# Altium PCB Bubble_OCB100.PcbDoc
Units mm, origin at the board's own origin, x right, y up, seen from the top; angles counter-clockwise.
Board outline 31.2 x 33.75 mm, 2 copper layers (Top Layer, Bottom Layer); 33 components, 23 nets, 103 pads, 16 vias.
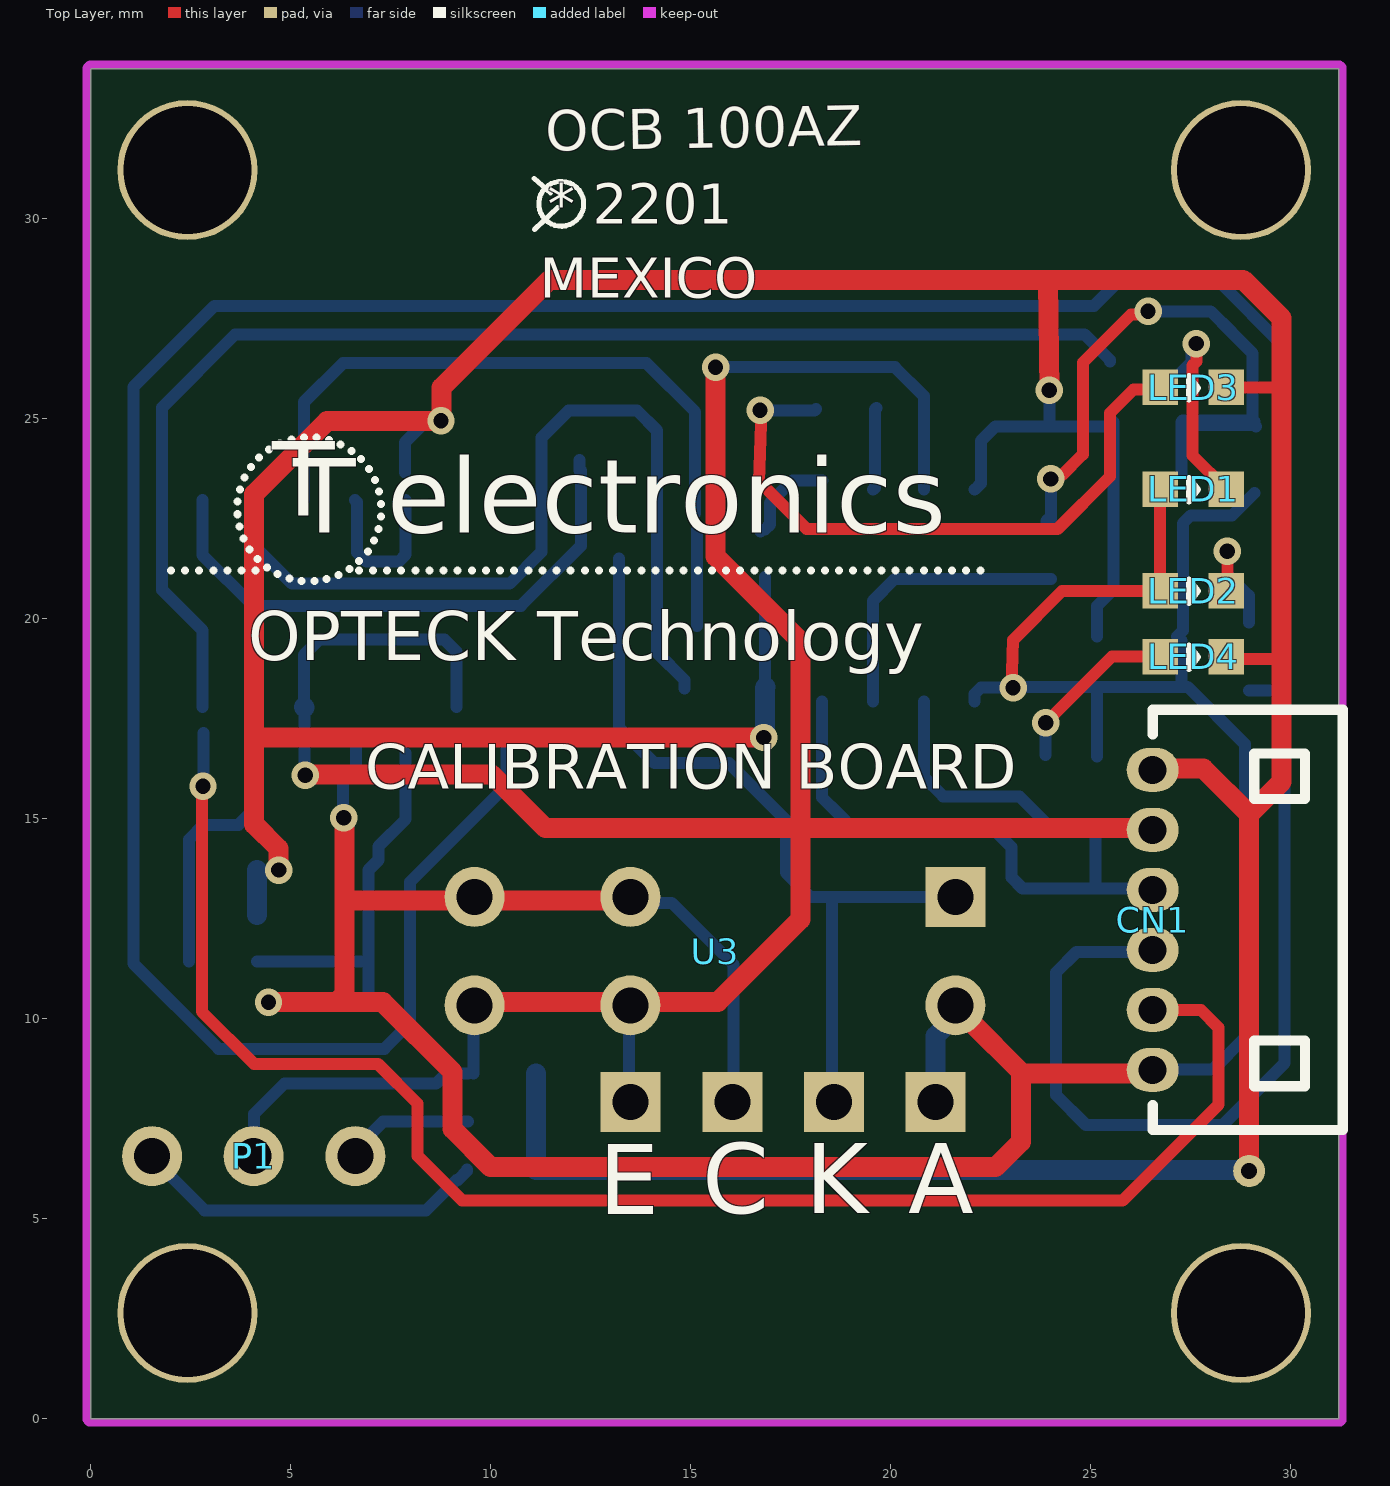
[diagram p0: Top Layer view]
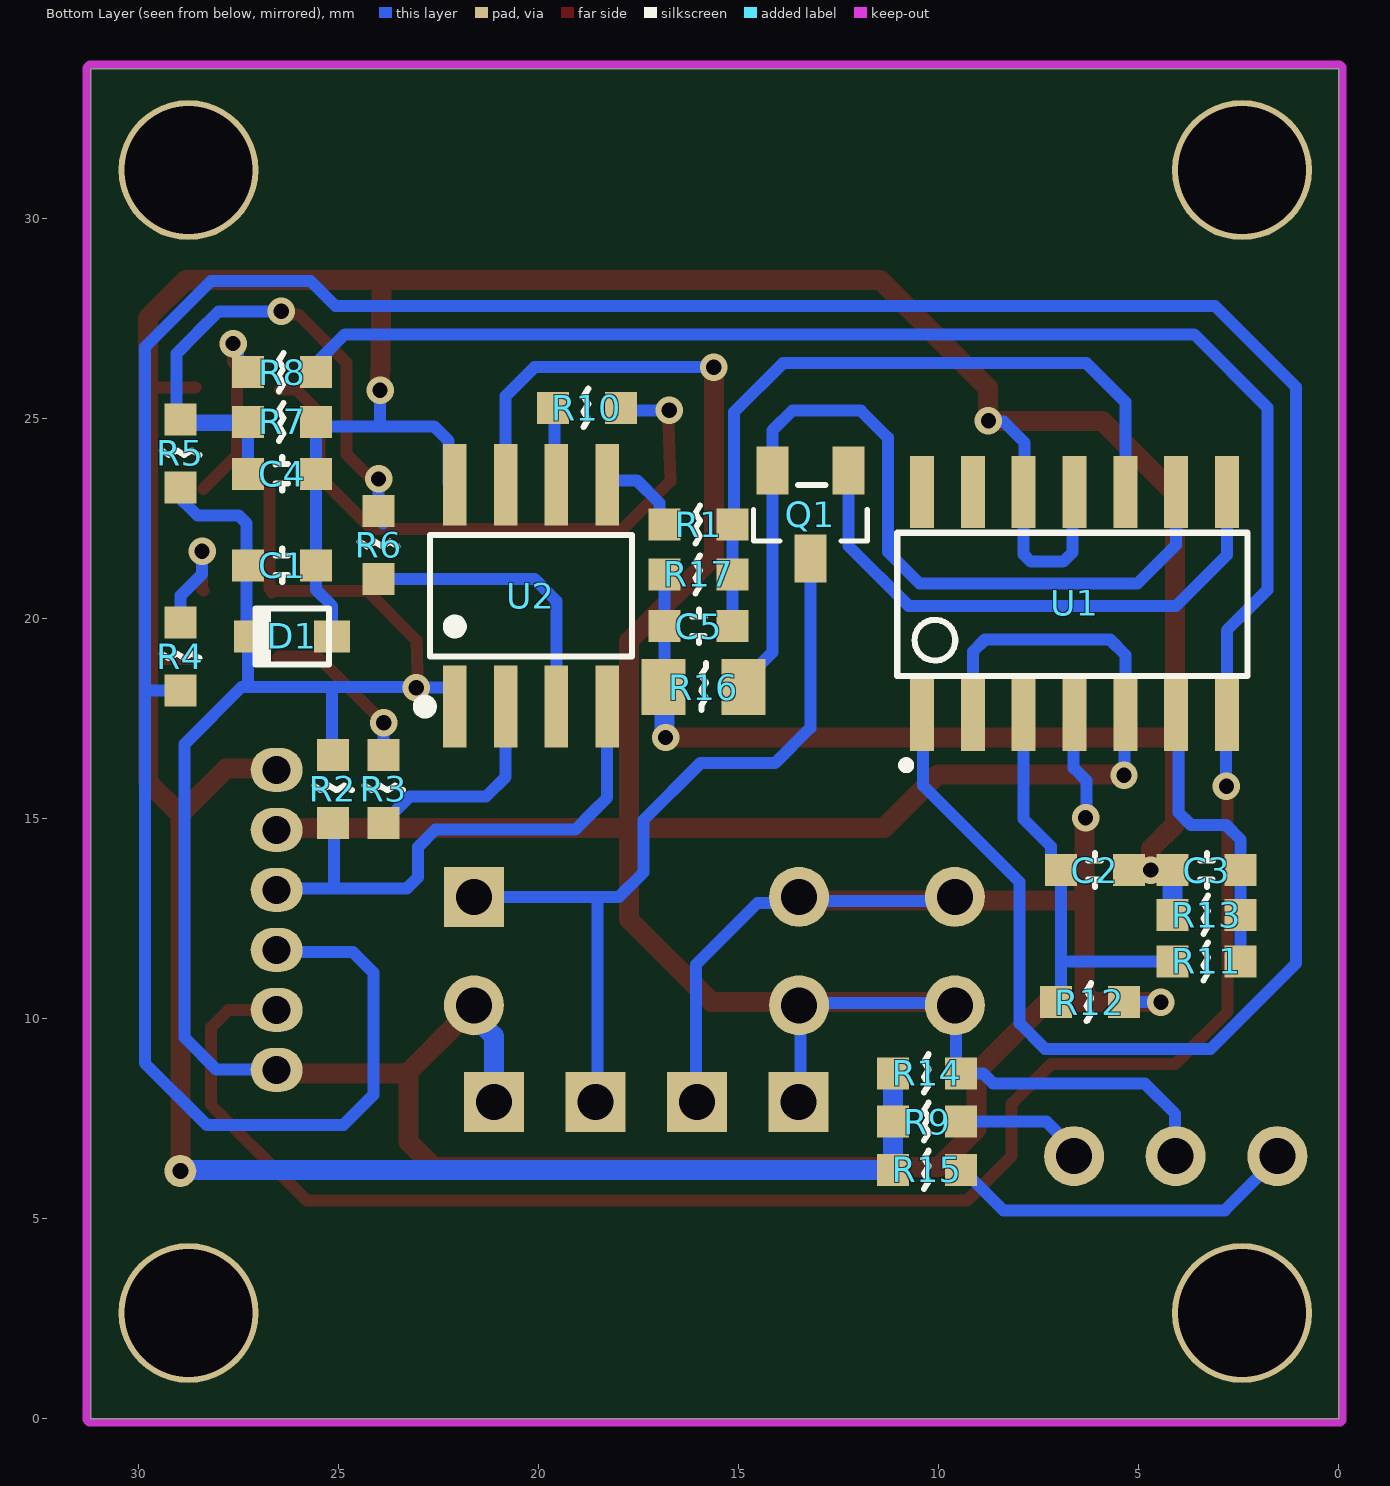
[diagram p1: Bottom Layer view, seen from below]
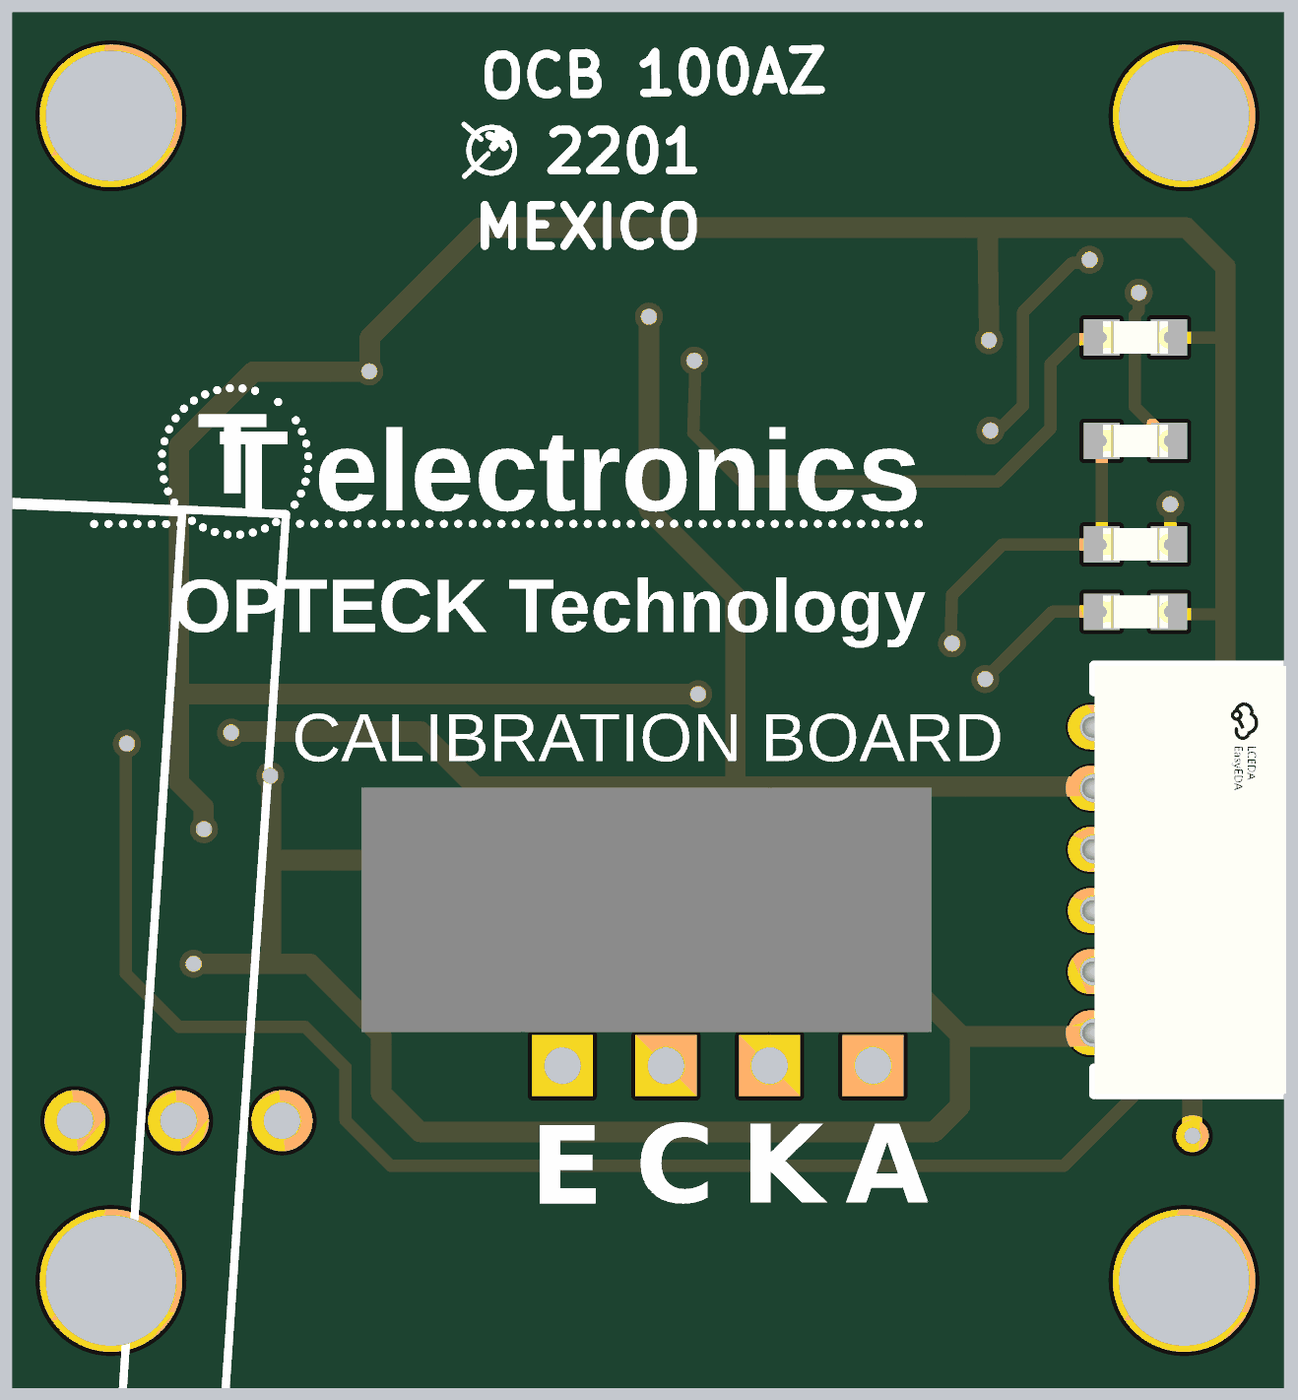
[diagram p2: 3D render of the assembled board from above, using the file's embedded part models]
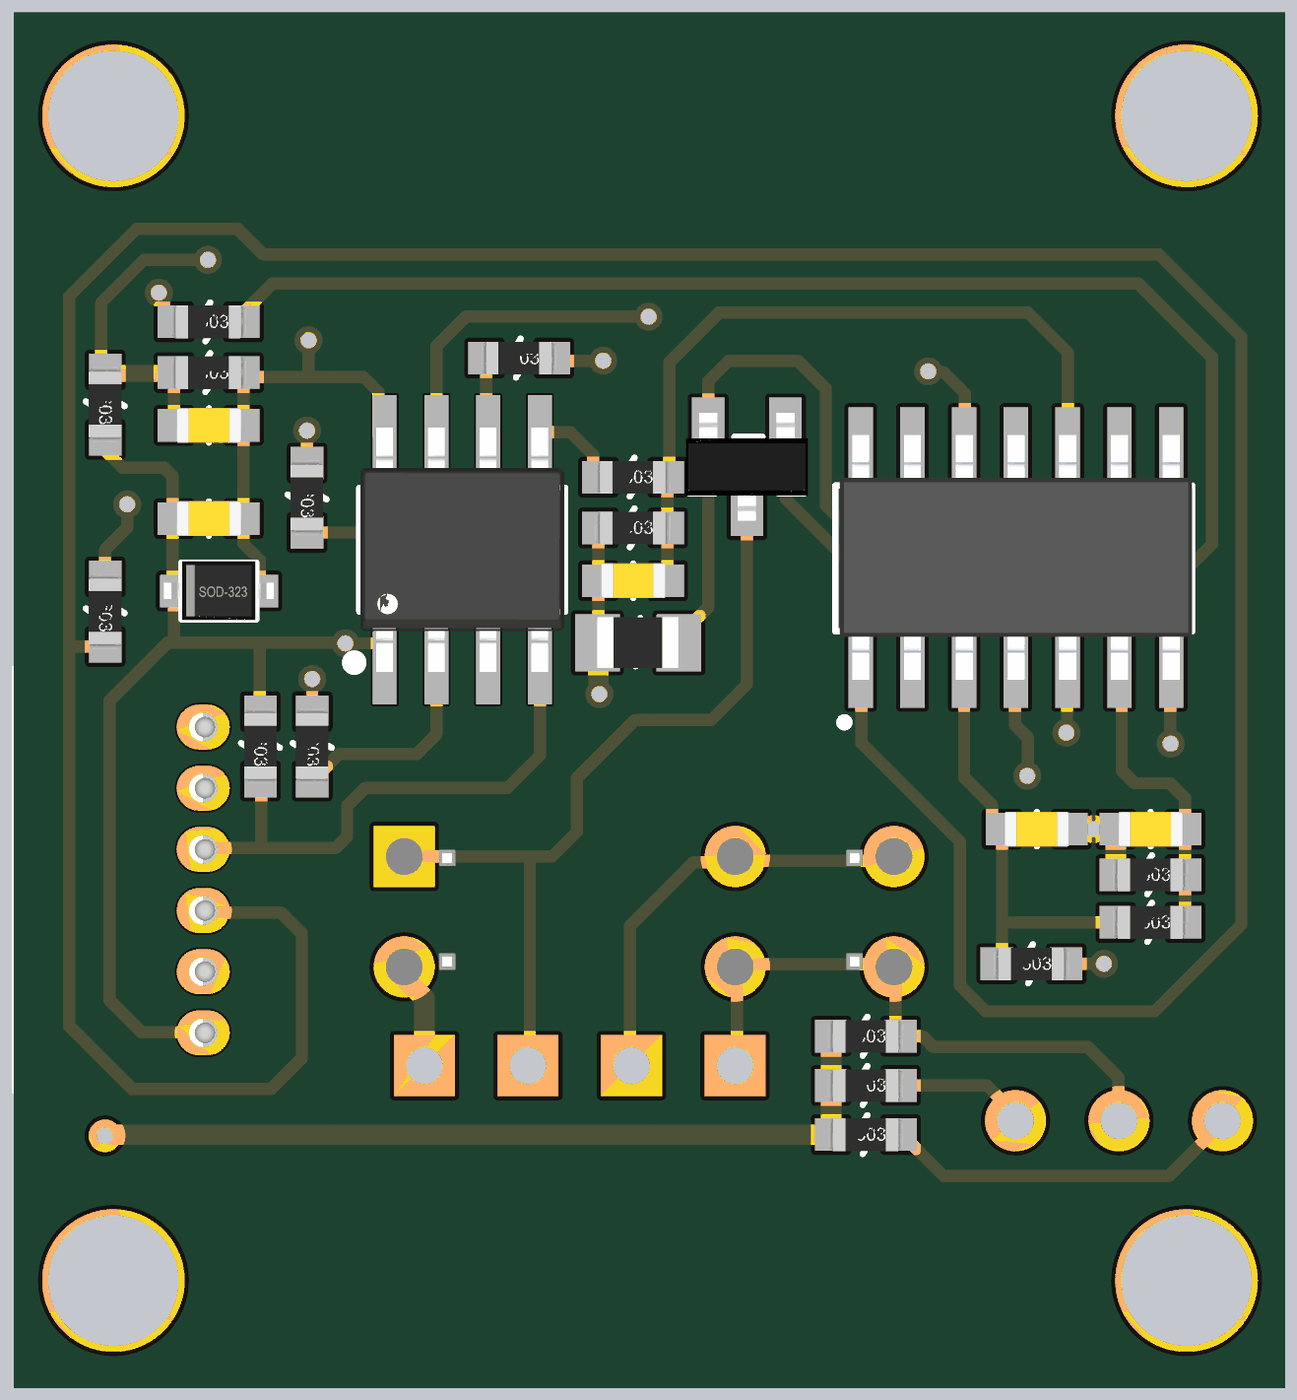
[diagram p3: 3D render of the assembled board from below, using the file's embedded part models]

## Layer stack, top to bottom
Top Solder: solder mask 0.0102, Solder Resist, Dk 3.5
Top Layer: signal copper 0.0356
Dielectric 1: dielectric 0.32, FR-4, Dk 4.8
Bottom Layer: signal copper 0.0356
Bottom Solder: solder mask 0.0102, Solder Resist, Dk 3.5

## Board outline
-0.001,0.001 -0.001,33.751 31.199,33.751 31.199,0.001

## Design rules (kind name [scope] priority, off if disabled: settings)
Clearance [All] p1: gap=0.254 ignorepadtopadclearanceinfootprint=FALSE except(0: Arc-Hole Track-Hole SMDPad-Hole THPad-Hole Via-Hole Fill-Hole Poly-Hole Region-Hole Text-Hole)
PolygonConnect CAM_PolygonConnect_$Net23 [InNet('$Net23')] p1: connectstyle=Direct reliefconductorwidth=0.254 reliefentries=4 polygonreliefangle="90 Angle" airgapwidth=0.254
PolygonConnect CAM_PolygonConnect_$Net9 [InNet('$Net9')] p2: connectstyle=Direct reliefconductorwidth=0.254 reliefentries=4 polygonreliefangle="90 Angle" airgapwidth=0.254
PolygonConnect CAM_PolygonConnect_$Net16 [InNet('$Net16')] p3: connectstyle=Direct reliefconductorwidth=0.254 reliefentries=4 polygonreliefangle="90 Angle" airgapwidth=0.254
PolygonConnect [All] p4: connectstyle=Relief reliefconductorwidth=0.254 reliefentries=4 polygonreliefangle="90 Angle" airgapwidth=0.254
RoutingVias [All] p1: holewidth=0.4 width=0.7 viastyle="Through Hole" minholewidth=0.3 minwidth=0.5 maxholewidth=0.9 maxwidth=1.27
SolderMaskExpansion [All] p1: expansion=0.102 istentingtop=FALSE
SupplyNets "Schematic Supply Nets_1" [InNet('+5V')] p1: voltage=0.000
SupplyNets "Schematic Supply Nets" [InNet('GND')] p2: voltage=0.000
Width [All] p1: maxlimit=2 minlimit=0.15 preferedwidth=0.254
30 further rules are at their usual default settings.

## Components (designator, comment, footprint, x,y, rotation, side; value= is the part's Value field where it differs from the comment)
C1 "100nF" C0603-NO 26.415,21.337 r180 bottom
C2 "100nF" C0603-NO 6.095,13.717 r180 bottom
C3 "100nF" C0603-NO 3.301,13.717 r180 bottom
C4 "100nF" C0603-NO 26.415,23.623 r180 bottom
C5 "100nF" C0603-NO 16.001,19.813 r180 bottom
CN1 "HC-ZH1.5-6AW" CONN-TH_6P-P1.50_HCTL_C-ZH1.5-6AW 26.549,12.472 r90 top locked
D1 "D Zener" SOD-323 26.161,19.559 r180 bottom
LED1 "LED" "CHIPLED_0603 - NO" 27.558,23.242 r270 top
LED2 "LED" "CHIPLED_0603 - NO" 27.558,20.702 r270 top
LED3 "LED" "CHIPLED_0603 - NO" 27.558,25.782 r270 top
LED4 "LED" "CHIPLED_0603 - NO" 27.558,19.051 r270 top
P1 "Header 3" HDR1X3 6.614,6.564 r180 top
Q1 "S8050" SOT23 13.207,22.607 r0 bottom
R1 "100kΩ" R0603-NO 16.001,22.353 r180 bottom
R2 "10kΩ" R0603-NO 25.145,15.749 r270 bottom
R3 "470Ω" R0603-NO 23.875,15.749 r270 bottom
R4 "470Ω" R0603-NO 28.955,19.051 r270 bottom
R5 "10kΩ" R0603-NO 28.955,24.131 r270 bottom
R6 "220Ω" R0603-NO 24.002,21.845 r270 bottom
R7 "10kΩ" R0603-NO 26.415,24.919 r180 bottom
R8 "470Ω" R0603-NO 26.415,26.163 r180 bottom
R9 "2.7kΩ" R0603-NO 10.286,7.431 r180 bottom
R10 "470Ω" R0603-NO 18.795,25.274 r180 bottom
R11 "10kΩ" R0603-NO 3.301,11.431 r180 bottom
R12 "10kΩ" R0603-NO 6.222,10.415 r180 bottom
R13 "10kΩ" R0603-NO 3.301,12.6 r180 bottom
R14 "27kΩ" R0603-NO 10.286,8.637 r180 bottom
R15 "15kΩ" R0603-NO 10.286,6.224 r180 bottom
R16 "100Ω" R0805-NO 15.874,18.289 r180 bottom
R17 "39kΩ" R0603-NO 16.001,21.109 r180 bottom
U1 "LM324" SOIC127P600X175-14N 6.603,20.383 r90 bottom locked
U2 "PIC12F683" SOIC-8E 20.192,20.575 r90 bottom locked
U3 "Poto Transistor" U_SHAPE_OPTO 16.763,11.939 r0 top locked

## Footprints (in the part's own frame and the unit in brackets; to place one, negate y for a bottom-side part, rotate by r counter-clockwise, add the part's x,y. Pads: shape width x height; smd on the part's side, far side on the other; paste and mask are expansions set on the pad)
C0603-NO [mm]
  rect 0.8x0.8 smd mask+0.102: 1(-0.85,0) 2(0.85,0)
  silkscreen extent -0.16,-0.42 0.15,0.42, body extent -0.8,-0.43 0.8,0.43, height 0.8
"CHIPLED_0603 - NO" [mil]
  rect 35x35 smd: A(0,-32.5) C(0,32.5)
  silkscreen extent -11,-4 12,5, body extent -16,-31 16,31, height 22
CONN-TH_6P-P1.50_HCTL_C-ZH1.5-6AW [mm]
  oval 1.1x1.3 hole 0.7 paste-2539.97 mask+0.05: 1(-3.75,0) 2(-2.25,0) 3(-0.75,0) 4(0.75,0) 5(2.25,0) 6(3.75,0)
  silkscreen extent -5.25,-4.75 5.25,0, body extent -5.25,-4.71 5.25,0.29, height 3.6
HDR1X3 [mm] "Connector; Header; 3 Position"
  round 1.5 hole 0.9: 1(0,0) 2(2.54,0) 3(5.08,0)
R0603-NO [mm]
  rect 0.8x0.8 smd: 1(-0.85,0) 2(0.85,0)
  silkscreen extent -0.08,-0.48 0.04,0.48, body extent -1.06,-0.4 1.04,0.4, height 0.5
R0805-NO [mm]
  rect 1.1x1.4 smd: 1(-1,0) 2(1,0)
  silkscreen extent -0.06,-0.58 0.06,0.61, body extent -1.01,-0.62 0.99,0.63, height 0.6
SOD-323 [mm]
  rect 0.9x0.8 smd: A(1,0) K(-1,0)
  silkscreen extent -0.92,-0.7 0.92,0.71, body extent -1.35,-0.71 1.35,0.73, height 1.17
SOIC127P600X175-14N [mm]
  rect 1.8x0.6 smd: 1(-2.785,3.81) 2(-2.785,2.54) 3(-2.785,1.27) 4(-2.785,0) 5(-2.785,-1.27) 6(-2.785,-2.54) 7(-2.785,-3.81) 8(2.785,-3.81) 9(2.785,-2.54) 10(2.785,-1.27) 11(2.785,0) 12(2.785,1.27) 13(2.785,2.54) 14(2.785,3.81)
  silkscreen extent -4.14,-4.33 1.77,4.43, body extent -3,-4.33 3,4.33, height 1.75
SOIC-8E [mm] "SOIC, 8-Leads, Body 4.90x3.90mm, Pitch 1.27mm, IPC Medium Density"
  rect 2.045x0.588 smd paste+0 mask+0.051: 1(-2.773,1.905) 2(-2.773,0.635) 3(-2.773,-0.635) 4(-2.773,-1.905) 5(2.773,-1.905) 6(2.773,-0.635) 7(2.773,0.635) 8(2.773,1.905)
  silkscreen extent -2.92,-2.53 1.52,2.8, body extent -3,-2.5 3,2.5, height 1.75
SOT23 [mm]
  rect 0.8x1.2 smd: 1(-0.95,-1.1) 2(0.95,-1.1) 3(0,1.1)
  silkscreen extent -1.42,-0.74 1.42,0.66, body extent -1.5,-1.32 1.5,1.32, height 1.08
U_SHAPE_OPTO [mm]
  round 1.5 hole 0.9: 1(4.854,-1.602) 3(-7.166,1.107) 3(-3.272,1.107) 4(-7.166,-1.602) 4(-3.272,-1.602)
  rect 1.5x1.5 hole 0.9: 2(4.854,1.107)
  body extent -8.2,-3.2 5.8,2.8, height 11.58

## Part data
C1 C2 C3 C4 C5: library part Cap_0603, "Capacitor, X5R, ±10%, 6.3V", Manufacturer=N.A., Part Number=C0603-N.C., Volts=6.3V, Artikkelnr Noca=20069060, Artikkelnr Simpro=N.A., Footprint Doc=0603, LatestRevisionDate=2009-11-23, Manufacturer Part Number=N.A., Pin Count=2, Published=2009-05-08, Publisher="Nordic Semiconductor"
CN1: "1x6P 6P P=1.5mm Wire To Board Connector ROHS", Colour=-, Current Rating (Max)=1A, Flame Retardant Rating=UL94V-0, JLCPCB Part Class="Extended Part", LCSC Part Name="1x6P 间距:1.5mm 弯插 系列:ZH", Manufacturer=HCTL(华灿天禄), Operating Temperature Range=-25℃~+85℃, Rated Voltage (Max)=100V, Add into BOM=yes, Contact Material=Brass, Contact Plating=Tin, Convert to PCB=yes, Datasheet=https://atta.szlcsc.com/upload/public/pdf/source/20230711/CEA84C90BC30863458C9BDB0466F53F6.pdf, Device=HC-ZH1.5-6AW, Manufacturer Part=HC-ZH1.5-6AW, Mounting Style="Bend insert", Number of Pins=6P, Number of PINs Per Row=6, Number of Rows=1, Pins Structure=1x6P, Pitch=1.5mm, Plastic Material=PBT, Reference Series=ZH, Row Spacing=-, Supplementary Features="K-leg punch", Supplier=LCSC, Supplier Footprint=弯插,P=1.5mm, Supplier Part=C2845569, Symbol=HC-ZH1.5-6AW, X-Length of Bottom Edge on Board (Spacing Line)=10.5mm, Y-Width of Bottom Edge on Board=-, Z-Height of the Board=3.7mm
D1: library part Zener, "Zener Diode", LatestRevisionDate=17-Jul-2002, LatestRevisionNote="Re-released for DXP Platform.", PackageDescription="Diode, Thru-Hole; 2 Leads; 0.7 in Pin Spacing", PackageReference=DIODE-0.7, Published=8-Jun-2000, Publisher="Altium Limited"
LED1 LED2 LED3 LED4: library part LEDCHIP-LED0603, "SMD lamp beads"
P1: "Header, 3-Pin", LatestRevisionDate=17-Jul-2002, LatestRevisionNote="Re-released for DXP Platform.", Publisher="Altium Limited"
Q1: library part NPN, "NPN Bipolar Transistor", Code_JEDEC=TO-226-AA, LatestRevisionDate=17-Jul-2002, LatestRevisionNote="Re-released for DXP Platform.", PackageDescription="TO, Flat Index; 3 In-Line, Axial Leads; Body Dia. 4.8mm; Leads 0.55 x 0.51 mm (max)", PackageReference=TO-226-AA, Published=8-Jun-2000, Publisher="Altium Limited"
R1 R2 R3 R4 R5 R6 R7 R8 R9 R10 R11 R12 R13 R14 R15 R17: library part Res_0603, "Resistor, ±1%, 0.100W", Manufacturer=N.A., Part Number=R0603-N.C.Ω, Artikkelnr Noca=N.A., Artikkelnr Simpro=N.A., Footprint Doc=0603, LatestRevisionDate=2009-05-08, Manufacturer Part Number=N.A., Note="Chip Res", Pin Count=2, Published=2009-05-08, Publisher="Nordic Semiconductor"
R16: library part Res_0805, "Resistor, ±1%, 0.200W", Specification=±1%
U1: "Four channels 15nA 0.5V/us 1.2MHz SOIC-14 Operational Amplifier ROHS"
U3: library part U-Shape_Optosens, "4-Pin Phototransistor Optocoupler", DatasheetVersion=Nov-2003, LatestRevisionDate=04-Mar-2005, LatestRevisionNote="Sch pins 3 & 4 Swapped.", PackageReference=DIP-4, Published=24-Mar-1999, Publisher="Altium Limited"
U2: NAME=PIC12F683

## Free pads (board coordinates)
  round 3.5 hole 3.2: 1(2.416,2.643) 1(2.416,31.217) 1(28.753,2.643) 1(28.753,31.217)
  round 0.8 hole 0.4: 1(28.96,6.194)
  rect 1.5x1.5 hole 0.9: 2(13.497,7.915) 2(16.038,7.915) 2(18.578,7.915) 2(21.119,7.915)

## Via types
v1: diameter 0.686, hole 0.381, Top Layer to Bottom Layer, tented both sides, 16 vias

## Nets (pads, with @x,y where several pads share a name; then routed paths per layer and width w, separated by ;. In a path a pad name is that pad's centre, name@x,y a point inside that pad or via, vN(x,y) a via of type N, cw(c..) or ccw(c..) an arc to the next point about the centre after c; other vN are vias at no path point)
+5V: C1.1 CN1.1 D1.K LED1.A LED2.A pad.2@16.038,7.915 pad.2@21.119,7.915 R2.1 R5.2 R12.2 U1.4 U2.1 U3.1 U3.3 | length 90.1
  Top Layer w0.3: v1@23.018,18.235 v1@23.057,18.196 ; v1@23.018,18.235 23.019,18.277 23.057,19.466 24.288,20.696 26.629,20.696 LED2.A@26.669,20.656 ; LED2.A@26.669,20.696 26.732,20.76 LED1.A
  Top Layer w0.5: v1(4.444,10.415) 6.149,10.415 ; 6.349,12.918 6.349,10.615 6.149,10.415 ; v1@6.349,15.06 6.349,12.957 13.402,12.957 U3.3@13.491,13.046 ; U3.3@13.489,13.116 U3.3@13.493,13.116 ; U3.1@21.986,9.941 23.256,8.671 ; CN1.1 26.458,8.631 23.256,8.631 23.256,6.924 22.621,6.289 10,6.289 9.048,7.242 9.048,8.671 7.303,10.415 6.149,10.415
  Bottom Layer w0.3: v1(4.444,10.415) R12.2 ; v1@6.309,15.162 6.309,15.956 6.627,16.273 U1.4@6.627,16.908 ; U3.3@9.524,12.939 13.374,12.939 13.379,12.934 U3.3@13.493,12.82 ; U3.3@13.453,12.9 14.524,12.9 16.072,11.352 16.072,8.098 pad.2@16.152,8.018 ; U2.1@22.097,17.925 22.097,18.121 22.252,18.276 v1(23.059,18.276) ; v1@23.059,18.297 27.267,18.297 ; R2.1@25.161,16.551 25.161,18.258 ; CN1.1@26.47,8.733 28.058,8.733 28.852,9.526 28.852,16.869 27.423,18.297 27.267,18.297 ; R5.2@29.09,23.139 28.534,22.584 27.502,22.584 27.304,22.385 27.304,19.702 D1.K 27.267,19.453 27.267,18.297
  Bottom Layer w0.5: pad.2@21.119,7.915 21.119,9.569 21.617,10.067 U3.1
  other v1: 6.326,15.027
ADC: CN1.5 P1.2 pad.2@13.497,7.915 R14.2 U1.2 U1.5 U2.7 U3.4 | length 76
  Top Layer w0.5: v1@5.337,16.112 10.02,16.112 11.369,14.763 17.739,14.763 ; U3.4@9.603,10.417 15.675,10.417 17.739,12.481 17.739,14.763 ; v1(15.62,26.29) 15.62,21.561 17.739,19.442 17.739,14.763 ; CN1.5@26.212,14.763 17.739,14.763
  Bottom Layer w0.3: P1.2@4.166,6.669 4.087,6.748 4.087,7.621 4.841,8.375 8.636,8.375 8.636,8.382 8.89,8.636 9.435,8.636 R14.2 ; U1.5@5.333,17.798 5.333,19.099 5.715,19.481 8.84,19.481 9.143,19.178 U1.2@9.143,17.798 ; v1@5.349,16.102 U1.5@5.349,17.782 ; R14.2@9.564,8.637 U3.4@9.564,10.32 ; U3.4@9.603,10.399 13.254,10.399 U3.4@13.413,10.241 ; pad.2@13.453,8.137 13.453,10.299 U3.4@13.491,10.337 ; v1(15.62,26.29) 20.105,26.29 20.827,25.568 U2.7@20.827,23.225
  Bottom Layer w0.5: U1.5@5.333,17.798 U1.5@5.349,17.782 ; v1@5.349,16.102 v1(5.365,16.086)
CAL: CN1.4 R2.2 U2.4 | length 13.7
  Bottom Layer w0.3: U2.4@18.287,17.925 18.287,15.527 18.672,15.142 19.089,14.725 22.581,14.725 23.018,14.289 23.018,13.535 23.295,13.257 25.121,13.257 ; R2.2@25.121,14.844 25.121,13.257 ; CN1.4@26.629,13.257 25.121,13.257
GND: C1.2 C2.2 C3.1 C4.2 C5.1 CN1.6 D1.A LED3.C LED4.C pad.1@28.96,6.194 R7.2 R9.1 R13.1 R14.1 R15.1 R16.1 R17.1 U1.11 U1.12 U2.8 | length 123.3
  Top Layer w0.3: LED4.C@28.574,18.989 29.725,18.989 ; LED3.C@28.574,25.776 29.725,25.776
  Top Layer w0.5: v1(4.698,13.717) 4.692,13.723 4.692,14.257 4.087,14.862 4.087,16.926 ; v1@8.69,24.943 5.912,24.943 4.087,23.117 4.087,16.926 ; v1@8.77,24.943 8.77,25.776 11.469,28.475 28.812,28.475 29.764,27.522 29.764,15.914 28.96,15.109 ; v1@16.827,17.005 v1@16.866,17.005 ; v1(16.827,17.03) 4.191,17.03 4.087,16.926 ; 23.891,28.475 23.93,28.435 v1@23.97,25.697 ; CN1.6 26.583,16.256 27.813,16.256 28.96,15.109 ; pad.1@28.96,6.194 28.96,15.109
  Bottom Layer w0.3: U1.11@6.603,22.968 6.653,22.918 6.653,21.654 ; 6.663,21.654 6.888,21.429 7.697,21.429 7.873,21.605 U1.12@7.873,22.968 ; U1.12@7.857,23.655 7.857,24.409 8.373,24.925 v1@8.77,24.925 ; R17.1@16.851,21.045 C5.1 16.851,18.312 R16.1 ; U2.8@22.097,23.225 22.252,23.38 22.252,24.444 22.614,24.806 23.964,24.806 ; v1(23.964,25.711) 23.964,24.806 ; D1.A 25.161,20.321 25.565,20.725 C1.2 C4.2 R7.2 ; R7.2@25.558,24.806 23.964,24.806
  Bottom Layer w0.5: R13.1 C3.1 ; R15.1 28.96,6.224 pad.1@28.96,6.194 ; R15.1@11.136,6.336 R9.1 R14.1 ; v1(16.827,17.03) 16.85,17.054 16.85,18.266 R16.1
  other v1: 8.756,24.948
NetC2_1: C2.1 R11.1 R12.1 U1.3 | length 9.3
  Bottom Layer w0.3: R11.1 6.746,11.431 ; R12.1 6.945,10.542 C2.1 7.195,13.967 7.195,14.309 7.874,14.988 7.874,16.644
NetC3_2: C3.2 R11.2 R13.2 U1.6 | length 6.5
  Bottom Layer w0.3: R11.2 R13.2 C3.2 2.451,14.479 2.817,14.844 3.69,14.844 4.007,15.162 U1.6@4.007,16.789
NetC4_1: C4.1 R5.1 R6.1 R7.1 | length 16.6
  Top Layer w0.3: v1(24.002,23.496) 24.106,23.496 24.203,23.593 24.288,23.593 24.804,24.109 24.804,26.403 26.013,27.612 26.359,27.612 v1(26.433,27.686)
  Bottom Layer w0.3: R6.1@23.891,22.385 23.891,22.445 23.942,22.496 24.002,22.496 v1(24.002,23.496) ; v1(26.433,27.686) 28,27.686 28.53,27.155 28.53,27.151 29.05,26.632 R5.1@29.05,24.885 ; C4.1 R7.1@27.265,24.846 ; R5.1@29.05,24.886 R5.1@29.09,24.925 ; R5.1@29.129,24.806 R5.1@29.05,24.885 ; R7.1@27.265,24.846 R5.1@29.01,24.846 ; R7.1@27.265,24.846 R7.1 27.296,24.95 28.906,24.95 R5.1@29.01,24.846 ; R5.1@29.01,24.846 R5.1@29.05,24.885
NetC5_2: C5.2 R1.2 R17.2 U1.10 | length 18.1
  Bottom Layer w0.3: U1.10@5.333,22.968 5.333,25.417 6.309,26.394 13.889,26.394 15.112,25.171 R1.2@15.112,22.629 ; C5.2 15.151,21.045 R1.2@15.151,22.226
NetLED1_C: LED1.C R8.1 | length 4.9
  Top Layer w0.3: v1(27.64,26.879) 27.64,26.429 27.542,26.332 27.542,24.084 LED1.C
  Bottom Layer w0.3: R8.1 27.515,26.413 27.515,26.65 27.64,26.775 v1(27.64,26.879)
NetLED2_C: LED2.C R4.1 | length 3
  Top Layer w0.3: LED2.C 28.415,20.734 v1(28.415,21.687)
  Bottom Layer w0.3: v1(28.415,21.687) 28.415,21.115 28.955,20.576 R4.1
NetLED3_A: LED3.A R10.2 | length 15.8
  Top Layer w0.3: v1@16.767,25.22 16.707,23.434 17.898,22.244 24.169,22.244 25.478,23.554 25.478,25.141 26.074,25.736 LED3.A@26.47,25.736
  Bottom Layer w0.3: v1@16.747,25.203 18.096,25.203 R10.2@18.136,25.243
  other v1: 16.733,25.211
NetLED4_A: LED4.A R3.1 | length 4.1
  Top Layer w0.3: v1(23.875,17.4) 25.526,19.051 26.488,19.051 LED4.A@26.51,19.029
  Bottom Layer w0.3: R3.1 v1(23.875,17.4)
NetP1_1: P1.1 R9.2 | length 3.3
  Bottom Layer w0.3: P1.1@6.508,6.629 7.309,7.431 R9.2
NetP1_3: P1.3 R15.2 | length 8.5
  Bottom Layer w0.3: P1.3@1.785,6.272 2.847,5.21 8.384,5.21 9.149,5.974 9.186,5.974 9.407,6.196 R15.2@9.407,6.232
NetQ1_1: Q1.1 U1.8 | length 14.1
  Bottom Layer w0.3: U1.8@2.793,22.968 2.793,21.591 4.063,20.321 10.754,20.321 12.257,21.824 Q1.1 ; Q1.1@12.223,23.707 Q1.1@12.223,23.973
NetQ1_2: Q1.2 R16.2 U1.9 | length 22
  Bottom Layer w0.3: U1.9@4.063,22.968 4.063,21.845 5.033,20.875 10.475,20.875 11.27,21.671 11.27,24.528 11.945,25.203 13.659,25.203 14.157,24.705 Q1.2 14.157,19.156 14.842,18.471 R16.2@14.842,18.258
NetQ1_3: pad.2@18.578,7.915 Q1.3 U3.2 | length 20
  Bottom Layer w0.3: Q1.3 13.207,17.273 14.088,16.392 15.953,16.392 17.382,14.964 17.382,13.654 17.99,13.046 U3.2 ; pad.2@18.533,8.098 18.533,12.9
NetR1_1: R1.1 U2.5 | length 2.3
  Bottom Layer w0.3: R1.1@16.747,22.187 R1.1@16.787,22.226 ; R1.1@16.851,22.226 16.981,22.357 16.981,22.897 17.541,23.457 U2.5@18.295,23.457
NetR3_2: R3.2 U2.2 | length 5.4
  Bottom Layer w0.3: U2.2@20.827,17.925 20.827,16.043 21.311,15.559 23.215,15.559 R3.2
NetR6_2: R6.2 U2.3 | length 7.2
  Bottom Layer w0.3: U2.3@19.557,17.925 19.557,20.448 20.104,20.995 R6.2
NetR10_1: R10.1 U2.6 | length 2.1
  Bottom Layer w0.3: U2.6@19.557,23.225 19.601,23.269 19.601,25.23 R10.1
OUTA: CN1.2 R8.2 U1.7 | length 72.6
  Top Layer w0.3: v1@2.777,15.814 2.777,10.179 4.087,8.869 7.182,8.869 8.174,7.877 8.174,6.567 9.286,5.456 25.796,5.456 28.194,7.854 28.194,9.779 27.751,10.222 CN1.2
  Bottom Layer w0.3: U1.7@2.793,17.798 2.793,19.71 2.221,20.282 1.785,20.718 1.785,25.282 3.61,27.108 24.843,27.108 25.478,26.473 R8.2@25.478,26.433 ; U1.7@2.817,17.146 2.817,15.797 v1@2.856,15.757
  other v1: 2.807,15.815
OUTB: CN1.3 R4.2 U1.1 | length 92.3
  Bottom Layer w0.3: U1.1@10.397,16.948 10.397,15.837 7.976,13.416 7.976,9.884 7.341,9.249 3.198,9.249 1.07,11.376 1.07,25.798 3.094,27.822 25.081,27.822 25.708,28.449 28.185,28.449 29.844,26.79 29.844,18.161 ; CN1.3@26.55,11.669 24.645,11.669 24.129,11.154 24.129,8.098 24.883,7.344 28.296,7.344 29.844,8.891 29.844,18.161 ; R4.2 29.804,18.201 29.844,18.161
pads on no net: U1.13 U1.14

## Keep-outs
Keep-Out Layer:
  lines w0.2: -0.101,0.001 ccw(c-0.001,0.001) -0.001,-0.099 ; -0.101,0.001 ccw(c-0.001,0.001) -0.001,-0.099 ; -0.101,0.001 -0.101,33.751 ; -0.101,33.751 cw(c-0.001,33.751) -0.001,33.851 ; -0.101,33.751 cw(c-0.001,33.751) -0.001,33.851 ; -0.001,-0.099 31.199,-0.099 ; -0.001,33.851 31.199,33.851 ; 31.199,-0.099 ccw(c31.199,0.001) 31.299,0.001 ; 31.199,-0.099 ccw(c31.199,0.001) 31.299,0.001 ; 31.199,33.851 cw(c31.199,33.751) 31.299,33.751 ; 31.199,33.851 cw(c31.199,33.751) 31.299,33.751 ; 31.299,0.001 31.299,33.751

## Silkscreen, mask and mechanical layers (free items; w line width, h text height)
Top Overlay:
  circle w0.127: c11.761,30.374 r0.561
  lines w0.127: 11.083,31.007 11.498,30.643 ; 11.094,29.734 11.672,30.284
  lines w0.2: 7.409,21.209 7.409,21.209 ; 8.115,21.209 8.115,21.209 ; 8.821,21.209 8.822,21.209 ; 9.174,21.209 9.175,21.209 ; 9.528,21.209 9.528,21.209 ; 9.881,21.209 9.881,21.209 ; 10.234,21.209 10.234,21.209 ; 10.587,21.209 10.587,21.209 ; 19.061,21.209 19.062,21.209 ; 19.414,21.209 19.415,21.209 ; 20.12,21.209 20.121,21.209 ; 20.827,21.209 20.827,21.209 ; 21.18,21.209 21.18,21.209 ; 21.533,21.209 21.533,21.209 ; 21.886,21.209 21.886,21.209 ; 22.239,21.209 22.239,21.209 ; 4.123,21.204 4.123,21.204 ; 4.123,21.204 4.123,21.204 ; 10.94,21.209 10.94,21.209 ; 10.94,21.209 10.94,21.209 ; 11.646,21.209 11.646,21.209 ; 11.646,21.209 11.646,21.209 ; 12.352,21.209 12.353,21.209 ; 12.352,21.209 12.353,21.209 ; 12.352,21.209 12.353,21.209 ; 13.058,21.209 13.059,21.209 ; 13.058,21.209 13.059,21.209 ; 13.412,21.209 13.412,21.209 ; 13.412,21.209 13.412,21.209 ; 15.177,21.209 15.177,21.209 ; 15.177,21.209 15.177,21.209 ; 18.002,21.209 18.002,21.209 ; 18.002,21.209 18.002,21.209 ; 18.355,21.209 18.355,21.209 ; 18.355,21.209 18.355,21.209 ; 2.004,21.204 2.005,21.204 ; 2.358,21.204 2.358,21.204 ; 2.711,21.204 2.711,21.204 ; 3.064,21.204 3.064,21.204 ; 3.417,21.204 3.417,21.204 ; 3.665,22.612 ccw(c5.46,22.741) 3.665,22.612 ; 3.67,22.926 ccw(c5.461,22.741) 3.67,22.926 ; 3.714,22.302 ccw(c5.46,22.741) 3.714,22.302 ; 3.73,23.234 ccw(c5.461,22.741) 3.73,23.234 ; 3.77,21.204 3.77,21.204 ; 3.817,22.006 ccw(c5.46,22.741) 3.817,22.006 ; 3.842,23.527 ccw(c5.461,22.741) 3.842,23.527 ; 3.969,21.731 ccw(c5.46,22.741) 3.969,21.731 ; 4.003,23.797 ccw(c5.461,22.741) 4.003,23.797 ; 4.167,21.488 ccw(c5.459,22.74) 4.167,21.488 ; 4.209,24.034 ccw(c5.462,22.741) 4.209,24.034 ; 4.404,21.282 ccw(c5.459,22.74) 4.404,21.282 ; 4.453,24.231 ccw(c5.462,22.741) 4.453,24.231 ; 4.673,21.121 ccw(c5.459,22.74) 4.673,21.121 ; 4.727,24.384 ccw(c5.462,22.741) 4.727,24.384 ; 4.966,21.008 ccw(c5.459,22.74) 4.966,21.008 ; 5.024,24.486 ccw(c5.462,22.74) 5.024,24.486 ; 5.274,20.949 ccw(c5.459,22.739) 5.274,20.949 ; 5.334,24.536 ccw(c5.462,22.74) 5.334,24.536 ; 5.588,20.944 ccw(c5.459,22.739) 5.588,20.944 ; 5.647,24.53 ccw(c5.463,22.74) 5.647,24.53 ; 5.898,20.993 ccw(c5.459,22.739) 5.898,20.993 ; 5.956,24.471 ccw(c5.463,22.74) 5.956,24.471 ; 6.195,21.095 ccw(c5.46,22.739) 6.195,21.095 ; 6.249,24.359 ccw(c5.463,22.739) 6.249,24.359 ; 6.469,21.248 ccw(c5.46,22.738) 6.469,21.248 ; 6.518,24.197 ccw(c5.462,22.739) 6.518,24.197 ; 6.703,21.209 6.703,21.209 ; 6.713,21.446 ccw(c5.46,22.738) 6.713,21.446 ; 6.755,23.992 ccw(c5.462,22.739) 6.755,23.992 ; 6.925,21.68 ccw(c5.467,22.735) 6.925,21.68 ; 6.953,23.748 ccw(c5.462,22.739) 6.953,23.748 ; 7.056,21.209 7.056,21.209 ; 7.08,21.952 ccw(c5.461,22.738) 7.08,21.952 ; 7.105,23.473 ccw(c5.462,22.738) 7.105,23.473 ; 7.192,22.245 ccw(c5.461,22.738) 7.192,22.245 ; 7.207,23.177 ccw(c5.462,22.738) 7.207,23.177 ; 7.252,22.553 ccw(c5.461,22.738) 7.252,22.553 ; 7.257,22.867 ccw(c5.461,22.738) 7.257,22.867 ; 7.762,21.209 7.762,21.209 7.762,21.209 ; 8.468,21.209 8.469,21.209 8.468,21.209 ; 11.293,21.209 11.293,21.209 ; 11.999,21.209 12,21.209 ; 12.705,21.209 12.706,21.209 ; 13.765,21.209 13.765,21.209 ; 14.118,21.209 14.118,21.209 ; 14.471,21.209 14.471,21.209 ; 14.824,21.209 14.824,21.209 ; 15.53,21.209 15.531,21.209 ; 15.883,21.209 15.884,21.209 ; 16.236,21.209 16.237,21.209 ; 16.589,21.209 16.59,21.209 ; 16.943,21.209 16.943,21.209 ; 17.296,21.209 17.296,21.209 ; 17.649,21.209 17.649,21.209 ; 18.708,21.209 18.708,21.209 ; 19.767,21.209 19.768,21.209 19.767,21.209 ; 20.474,21.209 20.474,21.209 20.474,21.209
  text "OCB 100AZ" at 11.372,31.699 h1 r1
  text "* 2201" at 11.427,29.87 h1
  text "MEXICO" at 11.224,28.019 h1
  text "T" at 4.535,21.959 h3.2
  text "T" at 5.063,21.532 h3.2
  text "electronics" at 7.411,21.539 h3.2
  text "OPTECK Technology" at 3.937,18.557 h2.1
  text "CALIBRATION BOARD" at 6.858,15.388 h1.9
  text "C" at 15.282,4.565 h3
  text "K" at 17.863,4.565 h3
  text "A" at 20.443,4.565 h3
  text "E" at 12.701,4.534 h3